# Altium PCB o_core_v1.PcbDoc (part 2 of 2)
Units mm, origin at the board's own origin, x right, y up, seen from the top; angles counter-clockwise.
Board outline 104 x 81 mm, 4 copper layers (Top Layer, GND_Layer, MidLayer2, Bottom Layer); 166 components, 151 nets, 748 pads, 250 vias.
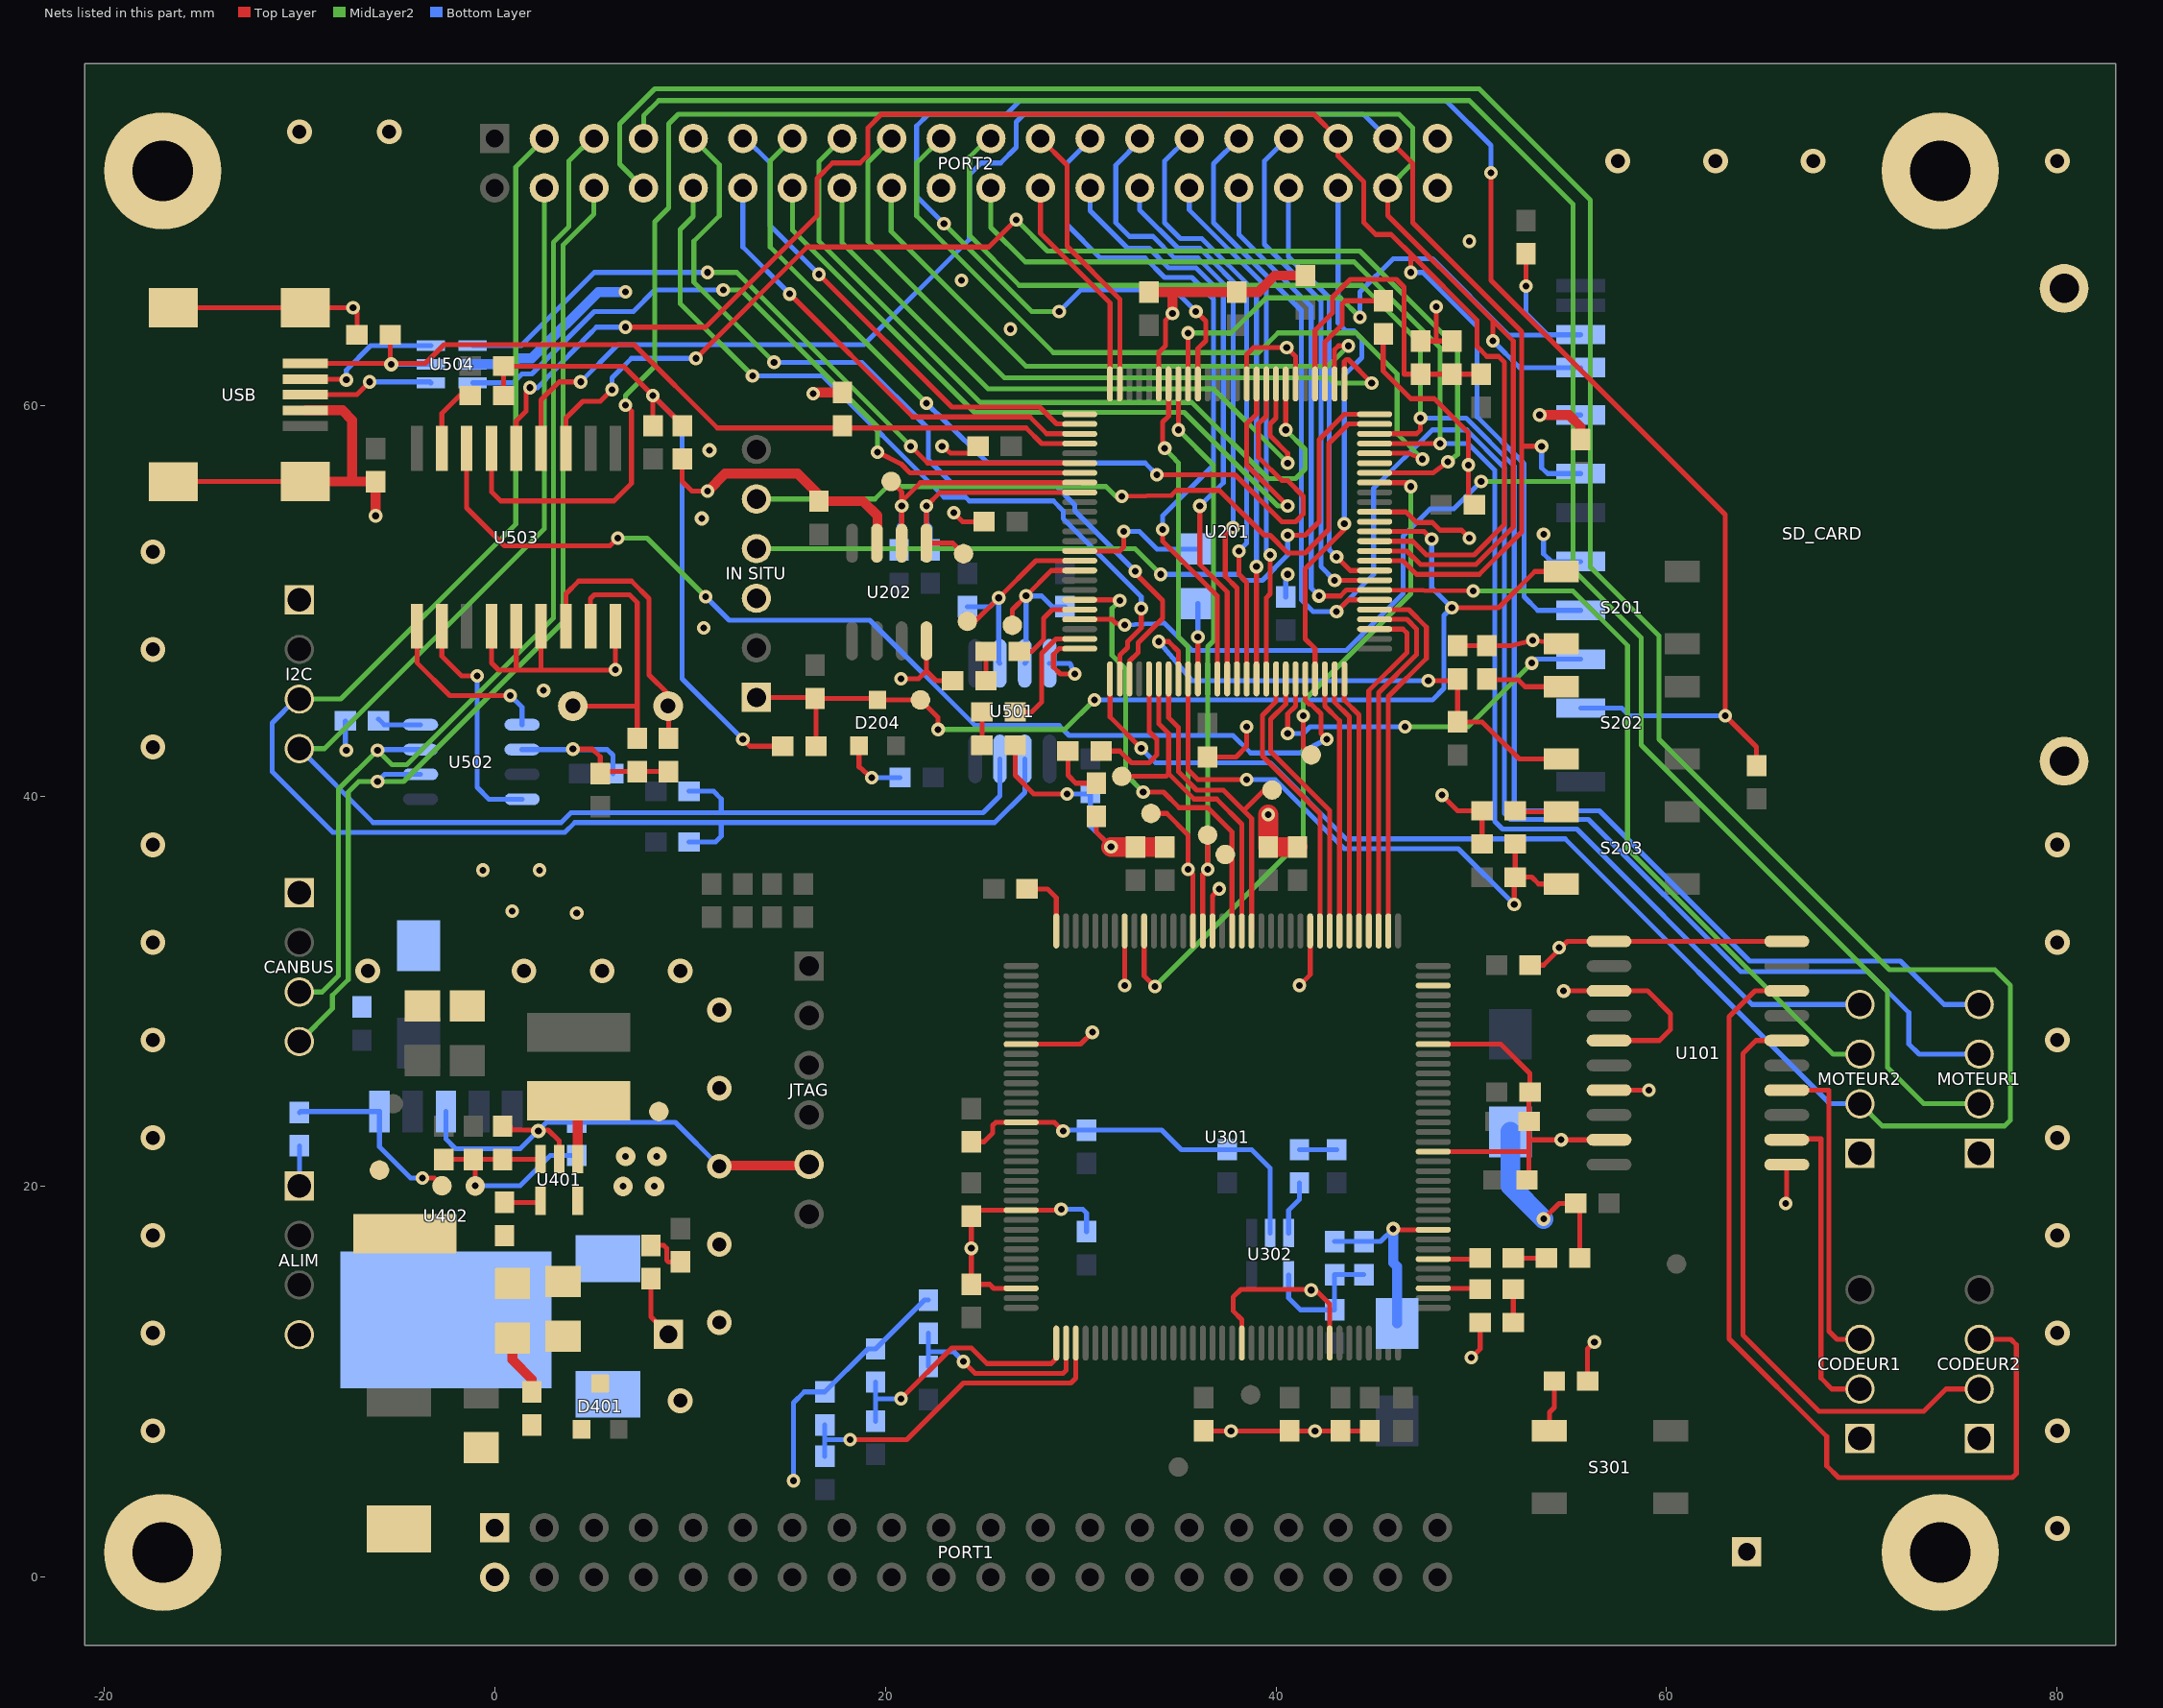
[diagram p4: the nets of this part, all layers, seen from the top]

## Via types
v1: diameter 0.7, hole 0.35, Top Layer to Bottom Layer, 202 vias
v2: diameter 1.27, hole 0.711, Top Layer to Bottom Layer, 37 vias
v3: diameter 1, hole 0.35, Top Layer to Bottom Layer, 5 vias
v4: diameter 0.75, hole 0.35, Top Layer to Bottom Layer, 3 vias
v5: diameter 0.73, hole 0.35, Top Layer to Bottom Layer, 2 vias
v6: diameter 0.7, hole 0.35, Top Layer to Bottom Layer, tented bottom, 1 vias

## Nets (pads, with @x,y where several pads share a name; then routed paths per layer and width w, separated by ;. In a path a pad name is that pad's centre, name@x,y a point inside that pad or via, vN(x,y) a via of type N, cw(c..) or ccw(c..) an arc to the next point about the centre after c; other vN are vias at no path point) (continued)
GND: "IN SITU.3" ALIM.1 ALIM.4 C101.2 C201.1 C202.1 C203.1 C204.2 C205.2 C206.1 C207.1 C209.2 C210.2 C211.2 C212.1 C213.1 C214.1 C215.2 C216.1 C217.1 C301.1 C302.1 C303.1 C304.1 C305.1 C306.1 C307.1 C308.1 C309.1 C310.1 C311.1 C312.1 C313.1 C314.1 C315.1 C316.1 C317.2 C318.2 C319.2 C320.1 C321.1 C402.1 C405.1 C406.1 C408.1 C409.2 C410.1 C411.1 C501.2 C502.1 C503.1 C504.2 C505.2 C506.2 C507.1 C509.2 C510.1 CANBUS.1 CODEUR1.1 CODEUR2.1 D204.1 D401.1 D402.1 D403.1 I2C.1 JTAG.5 MOTEUR1.1 MOTEUR2.1 P6.1 P7.1 pad.0 pad.1 pad.2 pad.3 PORT1.1 PORT1.2 PORT2.39 PORT2.40 R203.1 R206.2 R209.2 R210.2 R213.1 R214.1 R305.2 R308.1 R309.1 R310.1 R317.1 R318.2 R319.2 R401.1 R405.1 R407.1 R408.1 R501.1 S201.3 SD_CARD.3 SD_CARD.6 SD_CARD.10 SD_CARD.11 U101.1 U101.10 U101.11 U101.13 U101.15 U101.17 U101.19 U201.15 U201.31 U201.36 U201.45 U201.65 U201.75 U202.4 U202.7 U301.9 U301.17 U301.26 U301.34 U301.56 U301.65 U301.81 U301.89 U301.100 U301.106 U301.118 U301.128 U301.137 U302.2 U401.2 U402.3 U402.6 U501.4 U502.2 U503.4 U503.5 U503.6 U503.9 U504.2 USB.4 USB.MH1 USB.MH2 USB.MH3 USB.MH4 | length 365.6
  Top Layer w0.254: USB.MH3@-16.45,56.09 -9.705,56.09 USB.MH1@-9.7,56.095 ; USB.MH4@-16.45,64.99 USB.MH2@-9.7,64.99 v1(-7.252,64.999) -7.05,64.75 C509.2@-7.05,63.6 ; C504.2@-6.105,56.095 C504.2@-6.1,56.09 ; U503.4@-0.17,48.69 -0.17,46.81 0.2,46.44 1.1,46.44 ; R405.1@0.4,23.09 0.75,23.09 0.94,22.9 2.74,22.9 3.3,22.34 U401.2@3.3,21.415 ; U503.5@1.1,48.69 1.1,46.44 ; U503.6@2.37,48.69 2.37,46.47 2.4,46.44 ; v1(4,42.4) 5,42.4 5.4,42 C507.1@5.4,41.15 5.5,41.25 C502.1@7.2,41.25 ; U503.9@6.18,48.69 v1(6.18,46.46) 6.2,46.44 2.4,46.44 ; C502.1@7.3,41.25 C503.1@8.9,41.25 ; R408.1@8,15.29 8,13.34 P7.1@8.9,12.44 ; C505.2@9.6,57.25 9.6,56.1 10.1,55.6 v1(10.9,55.6) ; v2(11.5,21.04) v2@11.54,21.08 ; D204.1@18.65,42.565 18.65,41.49 v1(19.3,40.94) ; U202.7@19.565,52.94 U202.7@19.6,52.975 ; v1(20.8,46) 21.7,46 22.1,46.4 ; U202.4@22.105,47.94 22.1,47.935 22.1,46.4 ; v1(22.9,57.9) 23.34,57.54 C211.2@24.95,57.54 ; R209.2@23.45,45.9 22.6,45.9 22.1,46.4 ; v1(23.5,54.5) 23.96,54.04 C205.2@25.05,54.04 ; C307.1@24.4,22.29 25.05,22.29 25.5,22.74 25.5,23.14 25.65,23.29 U301.17@26.95,23.29 28.65,23.29 v1(29.1,22.84) ; R206.2@26.65,42.6 26.65,41.05 27.6,40.1 v1(29.3,40.1) ; U301.34@26.95,14.79 25.55,14.79 25.35,14.99 C309.1@24.4,14.99 C308.1@24.4,18.49 24.7,18.79 U301.26@26.95,18.79 28.95,18.79 v1(29,18.84) ; U301.9@26.95,27.29 29.99,27.29 v1(30.6,27.9) ; v1(29.7,46.24) 28.96,46.24 28.6,46.6 28.6,47.24 28.9,47.54 U201.75@29.95,47.54 ; U201.65@29.95,52.54 32,52.54 32.2,52.74 v1(32.2,53.54) ; R210.2@30.8,38.95 30.8,38.14 v1(31.55,37.39) v1@31.5,37.44 ; v1@32.2,30.24 v1(32.25,30.29) U301.137@32.25,33.09 ; U201.45@34,61.09 34,62.7 34.35,63.05 34.35,64.35 v1(34.7,64.7) ; C314.1@36.3,7.49 C306.1@40.7,7.49 C310.1@43.3,7.49 C321.1@44.8,7.49 ; C210.2@36.5,41.99 37.95,41.99 38.5,42.54 v1(38.5,43.54) ; U301.128@36.75,33.09 36.75,34.89 v1(37.1,35.24) ; U301.56@38.25,11.99 38.25,13.19 37.8,13.64 37.8,14.34 38.2,14.74 42,14.74 42.75,13.99 U301.65@42.75,11.99 ; U201.36@38.5,61.09 38.5,62.6 38.85,62.95 v1(40.55,62.95) 41,62.5 U201.31@41,61.09 ; v1(41.2,30.3) 41.75,30.85 U301.118@41.75,33.09 ; U201.15@45.05,54.54 46.66,54.54 47.2,54 48,54 48.4,53.6 49.5,53.6 v1(49.9,53.2) ; R203.1@45.5,63.65 45.49,63.64 45.49,61.75 46.9,60.34 48.1,60.34 49.85,58.59 v1(49.85,56.94) C201.1@49.85,55.04 ; v1(46,17.84) 46.05,17.79 U301.81@48.05,17.79 ; C207.1@47.4,63.29 48.2,63.29 ; U301.89@48.05,21.79 52.9,21.79 52.95,21.84 ; U301.100@48.05,27.29 51.51,27.29 53,25.8 C304.1@53,24.84 52.95,24.79 C315.1@52.95,23.34 52.95,22.34 ; v1@48.2,65.04 48.2,63.29 ; v1(48.5,40.04) 49.3,39.24 R214.1@50.55,39.24 C217.1@50.55,37.54 ; C214.1@49,63.29 48.2,63.29 ; C216.1@49.3,47.69 R213.1@50.8,47.69 52.05,47.69 v1(53.144,47.97) S201.3@54.6,47.79 ; v1(50,11.24) 50.45,11.69 R319.2@50.45,13.04 ; C303.1@52.85,20.34 52.95,20.44 52.95,21.84 ; C311.1@53,31.34 53.7,31.34 54.915,32.555 U101.11@57.05,32.555 U101.10@66.15,32.555 ; v1(53.7,18.34) 54.5,19.14 C101.2@55.35,19.14 55.55,18.94 R318.2@55.55,16.34 ; v1@54.8,30.04 54.7,30.04 v1(54.725,30.015) U101.13@57.05,30.015 59.025,30.015 60.2,28.84 60.2,28.04 59.635,27.475 U101.15@57.05,27.475 ; R317.1@55.95,10.04 55.95,11.69 v1(56.3,12.04) ; U101.19@57.05,22.395 53.005,22.395 52.95,22.34 ; U101.17@57.05,24.935 v1(59.095,24.935) v1@59.1,24.94 ; v1(66.1,19.14) 66.15,19.19 U101.1@66.15,21.125 ; 1.1,46.44 2.4,46.44 ; 52.95,21.84 52.95,22.34
  Top Layer w0.508: USB.MH1@-9.7,56.095 -7.3,56.095 ; USB.4@-9.7,59.74 -7.8,59.74 -7.3,59.24 -7.3,56.095 ; C504.2@-6.105,56.095 -7.3,56.095 ; v1(-6.1,54.34) C504.2@-6.1,56.09 ; v1(10.9,55.6) 11.8,56.5 15.5,56.5 16.6,55.4 C215.2@16.6,55.09 18.85,55.09 19.6,54.34 U202.7@19.6,52.975 ; v2@11.54,21.08 JTAG.5@16.1,21.08 ; v1(16.3,60.6) 16.35,60.65 C209.2@17.8,60.65 ; C203.1@33.5,65.79 35.5,65.79 ; v1(34.7,64.7) 34.7,65.79 35.5,65.79 ; C206.1@41.5,66.64 39.94,66.64 39.09,65.79 C202.1@38,65.79 35.5,65.79 ; v1(53.5,59.5) 55,59.5 55.6,58.9 C213.1@55.6,58.25
  Top Layer w1.016: v1(31.55,37.39) C312.1@32.8,37.39 C302.1@34.3,37.39 ; v1(39.6,39.04) C316.1@39.6,37.39 C301.1@41.1,37.39
  Bottom Layer w0.254: ALIM.1@-10,20.04 C411.1@-10,22.09 ; R501.1@-7.65,43.84 -7.65,42.39 v1(-7.6,42.34) ; U402.3@-2.5,23.84 -2.5,22.44 -2,21.94 1.3,21.94 2.65,23.29 C408.1@4.2,23.29 9.25,23.29 v2(11.5,21.04) ; U502.2@1.4,42.375 5.765,42.375 6.05,42.09 C501.2@6.05,41.14 ; v1(15.3,4.94) 15.3,8.94 15.85,9.49 R310.1@16.9,9.49 19.1,11.69 R309.1@19.5,11.69 22,14.19 R308.1@22.2,14.19 ; v1(19.3,40.94) C506.2@20.75,40.94 ; U501.4@28.405,46.79 29.45,46.79 v1(29.7,46.24) ; v1(29,18.84) 30.1,18.84 30.3,18.64 C305.1@30.3,17.69 ; v1(29.1,22.84) 29.15,22.89 C313.1@30.3,22.89 34.15,22.89 35.15,21.89 C319.2@37.5,21.89 38.75,21.89 39.7,20.94 U302.2@39.7,17.615 ; v1(29.3,40.1) 30.41,40.1 C510.1@30.5,40.19 30.5,38.44 v1(31.55,37.39) ; v1(32.2,53.54) 33,53.54 33.9,52.64 C204.2@36,52.64 ; C212.1@40.5,50.19 40.5,51.24 v1(40.6,51.34) ; R305.2@43,17.19 C320.1@44.5,17.19 45.35,17.19 v1(46,17.84) ; v1(53.5,59.5) SD_CARD.6@55.6,59.5 ; v1(53.7,53.4) 53.7,52.4 54.1,52 SD_CARD.3@55.6,52
  Bottom Layer w0.508: U504.2@-1.125,62.1 0.9,62.1 1.2,62.4 1.9,62.4 5.3,65.8 v1(6.7,65.8) ; v1(46,17.84) 46,16.1 46.2,15.9 C317.2@46.2,13
  Bottom Layer w1.016: C318.2@52,22.8 52,20.04 v1(53.7,18.34)
  other v1: 37.7,7.49 42,7.49 41.8,14.7 24.4,16.84 54.6,22.395 54.5,32.24 4.2,34 0.9,34.1 -0.6,36.2 2.3,36.2 2.5,45.4 10.7,48.6 26.4,63.9 48.2,65.04 23.9,66.4 49.9,68.4
  other v2: 80,2.5 -17.5,7.5 80,7.5 9.5,9.04 -17.5,12.5 80,12.5 11.5,13.04 11.5,17.04 -17.5,17.5 80,17.5 -17.5,22.5 80,22.5 11.5,25.04 -17.5,27.5 80,27.5 11.5,29.04 -6.5,31.04 1.5,31.04 5.5,31.04 9.5,31.04 -17.5,32.5 80,32.5 -17.5,37.5 80,37.5 -17.5,42.5 -17.5,47.5 -17.5,52.5 57.5,72.5 62.5,72.5 67.5,72.5 80,72.5 -10,74 -5.4,74
  other v4: 2.231,22.84 10.6,54.2 11,57.7
NetC204_1: C204.1 U201.85 | length 3.8
  Top Layer w0.254: U201.85@36,45.99 v1(36,48.14)
  Bottom Layer w0.254: v1(36,48.14) C204.1@36,49.84
NetC320_2: C320.2 R304.1 R305.1 U302.4 | length 7.1
  Bottom Layer w0.254: U302.4@40.65,15.465 40.65,14.29 41.25,13.69 R304.1@43,13.69 R305.1@43,15.49 C320.2@44.5,15.49
NetC401_1: C401.1 R401.2 | length 3.2
  Top Layer w0.508: C401.1@0.9,12.24 0.9,11.14 1.9,10.14 R401.2@1.9,9.49
NetC401_2: C401.2 C402.2 D401.3 L401.2 P2.1 R402.1 U401.5
NetC411_2: C411.2 P18.1 U402.1 | length 9.9
  Top Layer w0.254: v1(-3.7,20.44) -3.1,20.44 P18.1@-2.7,20.04
  Bottom Layer w0.254: C411.2@-10,23.79 -9.95,23.84 U402.1@-5.9,23.84 -5.9,22.04 -4.3,20.44 v1(-3.7,20.44)
NetC502_2: C502.2 U503.8 Y501.1 | length 14.3
  Top Layer w0.254: Y501.1@4,44.6 7.3,44.6 ; U503.8@4.91,48.69 4.9,48.7 4.9,50.1 5.1,50.3 6.9,50.3 7.3,49.9 7.3,44.6 ; C502.2@7.3,42.95 7.3,44.6
NetC503_2: C503.2 U503.7 Y501.2 | length 14.1
  Top Layer w0.254: U503.7@3.64,48.69 3.64,50.34 4.3,51 7,51 7.9,50.1 7.9,46.2 8.9,45.2 C503.2@8.9,42.95
NetC505_1: C505.1 D501.1 R502.2 R505.1 R506.2 | length 35.2
  Top Layer w0.254: R502.2@0.45,60.5 R505.1@0.45,62 6.6,62 v1(8.1,60.5) ; D501.1@8.1,58.95 v1(8.1,60.5) ; C505.1@9.6,58.95 9.6,59 v1(8.1,60.5) ; v1(12.7,42.9) 13.06,42.54 R506.2@14.75,42.54
  Bottom Layer w0.254: v1(8.1,60.5) 9.6,59 9.6,46 v1(12.7,42.9)
NetD201_1: D201.1 U201.74 | length 6.3
  Top Layer w0.254: D201.1@26.65,44.3 27.5,44.3 28,44.8 28,47.3 28.74,48.04 U201.74@29.95,48.04
NetD201_2: D201.2 R206.1 | length 1.7
  Top Layer w0.254: D201.2@24.95,44.3 24.95,42.7 R206.1@25.05,42.6
NetD202_1: D202.1 U201.71 | length 4.6
  Top Layer w0.254: D202.1@26.85,47.4 27.5,47.4 27.95,47.85 28.1,48 28.1,49.1 28.54,49.54 U201.71@29.95,49.54
NetD202_2: D202.2 R209.1 | length 1.5
  Top Layer w0.254: R209.1@25.15,45.9 D202.2@25.15,47.4
NetD203_1: D203.1 U201.80 | length 7.3
  Top Layer w0.254: D203.1@31.05,42.3 32,42.3 32.6,41.7 33.5,41.7 33.9,42.1 33.9,42.9 33.5,43.3 U201.80@33.5,45.99
NetD203_2: D203.2 R210.1 | length 2.9
  Top Layer w0.254: D203.2@29.35,42.3 29.35,41.05 29.75,40.65 R210.1@30.8,40.65
NetD301_1: D301.1 U301.78 | length 2.4
  Top Layer w0.254: U301.78@48.05,16.29 50.4,16.29 D301.1@50.45,16.34
NetD301_2: D301.2 R318.1 | length 1.7
  Top Layer w0.254: D301.2@52.15,16.34 R318.1@53.85,16.34
NetD302_1: D302.1 U301.75 | length 2.4
  Top Layer w0.254: U301.75@48.05,14.79 50.4,14.79 D302.1@50.45,14.74
NetD302_2: D302.2 R319.1 | length 1.7
  Top Layer w0.254: R319.1@52.15,13.04 D302.2@52.15,14.74
NetD403_2: D403.2 L402.1 P3.1 U401.1 | length 3
  Top Layer w0.254: L402.1@4.25,24.34 L402.1@4.3,24.39
  Top Layer w0.508: U401.1@4.25,21.415 L402.1@4.25,24.34
  other v3: 6.573,20.013 8.173,20.013 6.7,21.54 8.3,21.54
NetD404_2: D404.2 R408.2 | length 2.2
  Top Layer w0.254: R408.2@8,16.99 8.65,16.99 8.8,16.84 8.8,16.24 8.9,16.14 D404.2@9.5,16.14
NetR213_2: R213.2 S202.1 | length 4
  Top Layer w0.254: R213.2@50.8,45.99 50.85,45.94 52.4,45.94 52.75,45.59 S202.1@54.6,45.59
NetR214_2: R214.2 S203.1 | length 2.4
  Top Layer w0.254: R214.2@52.25,39.24 52.3,39.19 S203.1@54.6,39.19
NetR301_1: R301.1 R308.2 U301.38 | length 10.7
  Top Layer w0.254: v1(24,11.04) 24.6,10.44 29.1,10.44 29.25,10.59 U301.38@29.25,11.99
  Bottom Layer w0.254: R301.1@22.2,10.79 22.2,11.54 ; R308.2@22.2,12.49 22.2,11.54 ; v1(24,11.04) 23.5,11.54 22.2,11.54
NetR302_1: R302.1 R309.2 U301.37 | length 13.6
  Top Layer w0.254: v1(20.8,9.14) 23.4,11.74 24.4,11.74 25.2,10.94 28.5,10.94 28.75,11.19 U301.37@28.75,11.99
  Bottom Layer w0.254: R302.1@19.5,7.99 19.5,9.14 ; R309.2@19.5,9.99 19.5,9.14 ; v1(20.8,9.14) 19.5,9.14
NetR303_1: R303.1 R310.2 U301.39 | length 17.6
  Top Layer w0.254: v1(18.2,7.04) 21.1,7.04 24,9.94 29.5,9.94 29.75,10.19 U301.39@29.75,11.99
  Bottom Layer w0.254: R303.1@16.9,6.19 16.9,7.04 ; R310.2@16.9,7.79 16.9,7.04 ; v1(18.2,7.04) 16.9,7.04
NetR306_1: R306.1 R315.2 | length 1.9
  Bottom Layer w0.254: R306.1@41.2,21.89 R315.2@43.1,21.89
NetR306_2: R306.2 U302.3 | length 2.8
  Bottom Layer w0.254: U302.3@40.65,17.615 40.65,18.79 41.2,19.34 R306.2@41.2,20.19
NetR317_2: R317.2 S301.1 | length 2.7
  Top Layer w0.254: S301.1@54,7.49 54,8.44 54.25,8.69 R317.2@54.25,10.04
NetR320_2: R320.2 U301.144 | length 3.4
  Top Layer w0.254: R320.2@27.25,35.24 28.3,35.24 28.75,34.79 U301.144@28.75,33.09
NetR402_2: R402.2 U401.4 | length 1.9
  Top Layer w0.254: R402.2@0.5,19.19 2.275,19.19 U401.4@2.35,19.265
NetR501_2: R501.2 U502.8 | length 2.3
  Bottom Layer w0.254: R501.2@-5.95,43.94 -5.655,43.645 U502.8@-3.8,43.645
NetR502_1: R502.1 U503.17 | length 3.6
  Top Layer w0.254: U503.17@-2.71,57.79 -2.71,59.59 -1.8,60.5 R502.1@-1.25,60.5
NetU502_1: U502.1 U503.1 | length 9.1
  Top Layer w0.254: U503.1@-3.98,48.69 -3.98,46.82 -2.3,45.14 v1(0.8,45.14)
  Bottom Layer w0.254: v1(0.8,45.14) 1.4,44.54 U502.1@1.4,43.645
NetU502_4: U502.4 U503.2 | length 12
  Top Layer w0.254: U503.2@-2.71,48.69 -2.71,47.15 -1.7,46.14 v1(-0.9,46.14)
  Bottom Layer w0.254: v1(-0.9,46.14) -0.9,40.44 -0.295,39.835 U502.4@1.4,39.835
NetU504_4: U504.4 USB.3 | length 6.7
  Top Layer w0.254: USB.3@-9.7,60.54 -7.06,60.54 v1(-6.4,61.2)
  Bottom Layer w0.254: v1(-6.4,61.2) -3.325,61.2 U504.4@-3.275,61.15
NetU504_6: U504.6 USB.2 | length 7.5
  Top Layer w0.254: USB.2@-9.7,61.34 -7.64,61.34 v1(-7.6,61.3)
  Bottom Layer w0.254: v1(-7.6,61.3) -7.6,61.8 -6.35,63.05 U504.6@-3.275,63.05
OCORE_CAN_CANH: CANBUS.3 PORT2.5 U502.7 | length 54.8
  MidLayer2 w0.254: CANBUS.3@-10,29.96 -8.84,29.96 -8,30.8 -8,40.34 v1(-6,42.34) -5.25,41.59 -4.51,41.59 3,49.1 3,68.34 3.8,69.14 3.8,72.5 PORT2.5@5.02,73.72
  Bottom Layer w0.254: v1(-6,42.34) -5.965,42.375 U502.7@-3.8,42.375
OCORE_CAN_CANL: CANBUS.4 PORT2.6 U502.6 | length 53.6
  MidLayer2 w0.254: CANBUS.4@-10,27.42 -8.31,29.11 -8.31,29.79 -7.5,30.6 -7.5,40.2 -6.96,40.74 -4.66,40.74 3.5,48.9 3.5,68.2 5.08,69.78 PORT2.6@5.08,71.12
  Bottom Layer w0.254: v1(-6,40.74) -5.635,41.105 U502.6@-3.8,41.105
OCORE_I2C_SCL: I2C.4 PORT2.4 R503.1 U501.7 | length 77
  MidLayer2 w0.254: I2C.4@-10,42.42 -8.72,42.42 2.54,53.68 PORT2.4@2.54,71.12
  Bottom Layer w0.254: I2C.4@-10,42.42 -6.22,38.64 3.4,38.64 3.9,39.14 11.6,39.14 ; R503.1@9.95,40.24 11.2,40.24 11.6,39.84 11.6,39.14 ; U501.7@25.865,41.89 25.865,40.005 25,39.14 11.6,39.14
OCORE_I2C_SDA: I2C.3 PORT2.3 R504.1 U501.6 | length 84.4
  MidLayer2 w0.254: I2C.3@-10,44.96 -7.88,44.96 1.075,53.915 1.075,72.195 PORT2.3@2.54,73.66
  Bottom Layer w0.254: I2C.3@-10,44.96 -10.18,44.96 -11.4,43.74 -11.4,41.24 -8.3,38.14 3.6,38.14 4.1,38.64 11.6,38.64 ; R504.1@9.95,37.64 11.3,37.64 11.6,37.94 11.6,38.64 ; U501.6@27.135,41.89 27.135,40.175 25.6,38.64 11.6,38.64
PHA1: CODEUR1.2 U101.2 | length 16.2
  Top Layer w0.254: U101.2@66.15,22.395 66.195,22.44 67.9,22.44 67.9,10.2 68.46,9.64 CODEUR1.2@69.9,9.64
PHA2: CODEUR2.2 U101.6 | length 31.3
  Top Layer w0.254: U101.6@66.275,27.6 U101.6@66.15,27.475 64.575,27.475 63.9,26.8 63.9,12.4 67.8,8.5 73.16,8.5 74.3,9.64 CODEUR2.2@76,9.64
PHB1: CODEUR1.3 U101.4 | length 16.3
  Top Layer w0.254: U101.4@66.15,24.935 68.305,24.935 68.305,12.595 68.72,12.18 CODEUR1.3@69.9,12.18
PHB2: CODEUR2.3 U101.8 | length 47.2
  Top Layer w0.254: U101.8@66.15,30.015 64.515,30.015 63.2,28.7 63.2,12.2 68.2,7.2 68.2,5.7 68.8,5.1 77.7,5.1 77.9,5.3 77.9,11.9 77.62,12.18 CODEUR2.3@76,12.18
PIC_ADC_AN0: MOTEUR1.4 PORT2.21 U201.23 | length 88.9
  Top Layer w0.254: U201.23@45.05,58.54 47.2,58.54 47.4,58.74 v1(47.4,59.34)
  MidLayer2 w0.254: PORT2.21@25.4,73.66 25.26,73.66 24.3,72.7 24.3,68.7 26.86,66.14 44.41,66.14 47.4,63.15 v1(47.4,59.34)
  Bottom Layer w0.254: v1(47.4,59.34) 49.735,59.34 52.2,56.875 52.2,39.6 52.56,39.24 56.56,39.24 64.255,31.545 71.975,31.545 74.2,29.32 MOTEUR1.4@76,29.32
PIC_ADC_AN1: MOTEUR2.4 PORT2.22 U201.22 | length 79.7
  Top Layer w0.254: U201.22@45.05,58.04 v1(48.4,58.04)
  MidLayer2 w0.254: PORT2.22@25.4,71.12 25.4,69.1 27.16,67.34 44,67.34 48.4,62.94 v1(48.4,58.04)
  Bottom Layer w0.254: v1(48.4,58.04) 49.835,58.04 51.2,56.675 51.2,38.7 51.6,38.3 55.4,38.3 64.38,29.32 MOTEUR2.4@69.9,29.32
PIC_ADC_AN2: PORT2.19 U201.21 | length 40.7
  Top Layer w0.254: U201.21@45.05,57.54 46.8,57.54 v1(47.5,57.24)
  MidLayer2 w0.254: PORT2.19@22.86,73.66 21.6,72.4 21.6,69.7 28.6,62.7 39.105,62.7 40.105,63.7 44.1,63.7 46.2,61.6 46.2,58.54 v1(47.5,57.24)
PIC_ADC_AN3: PORT2.20
PIC_ADC_AN4: PORT2.17 U201.26 | length 37.7
  Top Layer w0.254: U201.26@43.5,61.09 43.5,62.24 43.6,62.34 43.7,62.34 v1(44.9,61.14)
  MidLayer2 w0.254: PORT2.17@20.32,73.66 19.1,72.44 19.1,68.4 26.1,61.4 42.74,61.4 43,61.14 v1(44.9,61.14)
PIC_ADC_AN5: PORT2.18 U201.27 | length 31.4
  Top Layer w0.254: U201.27@43,61.09 43,62.84 43.2,63.04 v1(43.7,63.04)
  MidLayer2 w0.254: PORT2.18@20.32,71.12 20.3,71.1 20.3,68.9 27.2,62 42.66,62 v1(43.7,63.04)
PIC_ADC_AN6: PORT2.15 U201.32 | length 40.7
  Top Layer w0.254: v1(40.5,58.74) U201.32@40.5,61.09
  MidLayer2 w0.254: PORT2.15@17.78,73.66 16.6,72.48 16.6,68.4 24.86,60.14 35.7,60.14 39.6,56.24 41,56.24 41.5,56.74 41.5,57.74 v1(40.5,58.74)
PIC_ADC_AN7: PORT2.16 U201.33 | length 34.8
  Top Layer w0.254: U201.33@40,61.09 40,59.34 39.7,59.04 39.7,58.44 40.6,57.54 v1(40.6,57.04)
  MidLayer2 w0.254: PORT2.16@17.78,71.12 17.78,68.32 25.26,60.84 36.8,60.84 v1(40.6,57.04)
PIC_ADC_AN8: PORT2.13 U201.34 | length 47.2
  Top Layer w0.254: v1(33.9,56.44) 37.9,56.44 40.3,54.04 41,54.04 41.4,54.44 41.4,55.34 40.6,56.14 40.3,56.14 39.1,57.34 39.1,59.04 39.5,59.44 U201.34@39.5,60.74
  MidLayer2 w0.254: PORT2.13@15.24,73.66 14.1,72.52 14.1,68.1 v1(22.1,60.1)
  Bottom Layer w0.254: PORT2.13@14.96,73.66 PORT2.13@15.24,73.66 ; v1(22.1,60.1) 25.26,57.04 33.3,57.04 v1(33.9,56.44)
PIC_ADC_AN9: PORT2.14 U201.35 | length 40.7
  Top Layer w0.254: U201.35@39,61.09 39,59.54 38.5,59.04 38.5,56.94 v1(40.6,54.84)
  MidLayer2 w0.254: PORT2.14@15.24,71.12 15.24,68.96 24.56,59.64 35.3,59.64 40.1,54.84 v1(40.6,54.84)
PIC_ADC_VREF+: C207.2 C214.2 R202.1 U201.29 | length 17.4
  Top Layer w0.254: U201.29@42,61.09 42,63.84 42.9,64.74 42.9,65.54 43.8,66.44 46.16,66.44 46.55,66.05 46.55,61.59 C207.2@47.4,61.59 C214.2@49,61.59 R202.1@50.5,61.59
PIC_ADC_VREF-: R203.2 U201.28 | length 6.6
  Top Layer w0.254: U201.28@42.5,61.09 42.5,63.24 43.38,64.12 43.38,65.18 43.55,65.35 R203.2@45.5,65.35
PIC_BP_1: C216.2 R207.1 S202.3 U201.83 | length 27.2
  Top Layer w0.254: v1(34,47.9) 34.5,47.9 35,47.4 U201.83@35,45.99 ; v1(47.8,45.9) 49.21,45.9 C216.2@49.3,45.99 R207.1@49.3,43.79 50.55,43.79 52.45,41.89 S202.3@54.6,41.89
  Bottom Layer w0.254: v1(34,47.9) 35.7,45.9 v1(47.8,45.9)
PIC_BP_2: C217.2 R208.1 S203.3 U201.84 | length 29.7
  Top Layer w0.254: U201.84@35.5,45.99 35.5,41.34 36,40.84 v6@38.4,40.84 ; v1(52.2,34.44) 52.2,35.79 R208.1@52.25,35.84 ; C217.2@52.25,37.54 R208.1@52.25,35.84 ; S203.3@54.6,35.49 53.45,35.49 53.1,35.84 R208.1@52.25,35.84
  Bottom Layer w0.254: v6(38.5,40.84) 39.96,40.84 43.5,37.3 49.34,37.3 v1(52.2,34.44)
PIC_CAN_INT: U201.19 U503.12 | length 64.5
  Top Layer w0.254: U503.12@3.64,57.79 3.64,59.34 4.5,60.2 5.4,60.2 v1(6,60.8) ; v1(10.3,62.4) 16,68.1 25.3,68.1 v1(26.7,69.5) ; U201.19@45.05,56.54 48.04,56.54 v1(48.8,57.1)
  MidLayer2 w0.254: v1(26.7,69.5) 28.3,67.9 44.3,67.9 49.3,62.9 49.3,57.49 v1(48.8,57.1)
  Bottom Layer w0.254: v1(6,60.8) 6,61.4 7,62.4 v1(10.3,62.4)
PIC_EEPROM_SCL: P16.1 R212.1 U201.58 U202.6 | length 15.2
  Top Layer w0.254: P16.1@20.3,56.1 20.835,55.565 v1@20.835,55.075 ; U202.6@20.835,52.94 v1(20.835,54.84) v1@20.835,55.075 ; U201.58@29.95,56.04 21.8,56.04 v1@20.835,55.075
  Bottom Layer w0.254: R212.1@20.7,52.59 20.7,53.805 20.835,53.94 v1(20.835,54.84)
PIC_EEPROM_SDA: P15.1 R211.1 U201.59 U202.5 | length 14.5
  Top Layer w0.254: P15.1@24,52.4 23.46,52.94 U202.5@22.105,52.94 v1(22.105,54.845) 22.8,55.54 U201.59@29.95,55.54
  Bottom Layer w0.254: v1(22.105,54.845) 22.105,53.935 22.3,53.74 R211.1@22.3,52.59
PIC_GPIO_0: MOTEUR1.3 PORT2.31 U201.6 | length 94.1
  Top Layer w0.254: v1(43.1,49.44) 43.7,50.04 U201.6@45.05,50.04
  Bottom Layer w0.254: PORT2.31@38.1,73.66 36.8,72.36 36.8,69.34 41.3,64.84 41.3,50.04 41.9,49.44 v1(43.1,49.44) 45,51.34 45,55.74 48,58.74 49.76,58.74 51.7,56.8 51.7,39.1 52,38.8 56,38.8 63.8,31 70.3,31 72.4,28.9 72.4,27.3 72.92,26.78 MOTEUR1.3@76,26.78
PIC_GPIO_1: MOTEUR2.3 PORT2.32 U201.7 | length 66.3
  Top Layer w0.254: v1(42.2,50.24) 43.3,50.24 43.6,50.54 U201.7@45.05,50.54 v1(50.1,50.5)
  MidLayer2 w0.254: v1(50.1,50.5) 55.2,50.5 58,47.7 58,37.3 68.52,26.78 MOTEUR2.3@69.9,26.78
  Bottom Layer w0.254: PORT2.32@38.1,71.12 38.1,68.74 41.8,65.04 41.8,50.64 v1(42.2,50.24)
PIC_GPIO_2: PORT2.33 U201.8 | length 26.7
  Top Layer w0.254: v1(43,51.04) U201.8@45.05,51.04
  Bottom Layer w0.254: PORT2.33@40.6,73.7 39.4,72.5 39.4,68.24 42.3,65.34 42.3,51.74 v1(43,51.04)
PIC_GPIO_3: PORT2.34 U201.9 | length 22.1
  Top Layer w0.254: v1(43.1,52.24) 43.8,51.54 U201.9@45.05,51.54
  Bottom Layer w0.254: PORT2.34@40.64,71.12 40.64,67.6 42.725,65.515 42.725,52.615 v1(43.1,52.24)
PIC_GPIO_4: PORT2.25 U201.87 | length 35.6
  Top Layer w0.254: v1(34.2,53.64) 34.2,53.04 37,50.24 U201.87@37,45.99
  Bottom Layer w0.254: PORT2.25@30.52,73.62 29.3,72.4 29.3,69.24 31,67.54 33.3,67.54 34.3,66.54 35.7,66.54 36.8,65.44 36.8,56.94 34.2,54.34 v1(34.2,53.64)
PIC_GPIO_5: PORT2.26 U201.88 | length 30.5
  Top Layer w0.254: v5(36.1,54.84) 36.1,51.84 37.5,50.44 U201.88@37.5,45.99
  Bottom Layer w0.254: PORT2.26@30.48,71.12 30.48,69.96 32.4,68.04 33.5,68.04 34.5,67.04 35.9,67.04 37.3,65.64 37.3,56.04 v5(36.1,54.84)
PIC_GPIO_6: PORT2.27 U201.89 | length 32.4
  Top Layer w0.254: v1(37.8,53.74) 37.4,53.34 37.4,51.24 38,50.64 U201.89@38,45.99
  Bottom Layer w0.254: PORT2.27@33.09,73.59 31.8,72.3 31.8,69.34 32.5,68.64 33.7,68.64 34.8,67.54 36,67.54 37.8,65.74 v1(37.8,53.74)
PIC_GPIO_7: PORT2.28 U201.90 | length 28.4
  Top Layer w0.254: v1(38.1,52.54) 38.1,51.34 38.5,50.94 U201.90@38.5,45.99
  Bottom Layer w0.254: PORT2.28@33.02,71.12 33.02,70 34.98,68.04 36.1,68.04 38.5,65.64 38.5,52.94 v1(38.1,52.54)
PIC_GPIO_8: PORT2.29 U201.91 | length 30.8
  Top Layer w0.254: U201.91@39,45.99 v1(39,51.74)
  Bottom Layer w0.254: PORT2.29@35.51,73.71 34.3,72.5 34.3,69.34 35.1,68.54 36.2,68.54 39,65.74 v1(39,51.74)
PIC_GPIO_9: PORT2.30 U201.92 | length 26.9
  Top Layer w0.254: U201.92@39.5,45.99 39.5,50.14 39.7,50.34 v1(39.7,52.34)
  Bottom Layer w0.254: PORT2.30@35.56,71.12 35.56,70 39.5,66.06 39.5,52.54 v1(39.7,52.34)
PIC_I2C_SCL: P14.1 R205.1 U201.66 U501.2 | length 12.2
  Top Layer w0.254: P14.1@24.2,48.94 24.6,48.94 v1(25.8,50.14) 27.7,52.04 U201.66@29.95,52.04
  Bottom Layer w0.254: R205.1@24.2,49.69 25.35,49.69 v1(25.8,50.14) 25.8,46.855 U501.2@25.865,46.79
PIC_I2C_SDA: P13.1 R204.1 U201.67 U501.3 | length 10.8
  Top Layer w0.254: P13.1@26.5,48.74 26.5,49.54 v1(27.2,50.24) 28.5,51.54 U201.67@29.95,51.54
  Bottom Layer w0.254: U501.3@27.135,46.79 27.2,46.855 v1(27.2,50.24) 28,50.24 28.55,49.69 R204.1@29.2,49.69
PIC_INSITU_PGC: "IN SITU.5" U201.24 | length 38.9
  Top Layer w0.254: v1(32.1,55.34) 34.652,55.392 34.9,55.64 37.1,55.64 39.4,53.34 39.7,53.34 40.6,52.44 41.5,52.44 42.7,53.64 42.7,58.04 43.7,59.04 U201.24@45.05,59.04
  MidLayer2 w0.254: 13.4,55.2 19.46,55.2 20.1,55.84 31.3,55.84 31.8,55.34 v1(32.1,55.34)
PIC_INSITU_PGD: "IN SITU.4" U201.25 | length 38.9
  Top Layer w0.254: v1(40.6,53.34) 41.5,53.34 42.2,54.04 42.2,58.24 43.5,59.54 U201.25@45.05,59.54
  MidLayer2 w0.254: 13.4,52.66 32.78,52.66 v1(34.1,51.34)
  Bottom Layer w0.254: v1(34.1,51.34) 38.1,51.34 38.4,51.04 39.3,51.04 40.6,52.34 v1(40.6,53.34)
PIC_INT1: P17.1 U201.18 U301.135 | length 38.2
  Top Layer w0.254: U301.135@33.25,33.09 33.25,30.79 v1(33.8,30.24) ; v1(41.4,44.1) 41.4,42.5 P17.1@41.8,42.1 ; U201.18@45.05,56.04 46.7,56.04 v1(46.9,55.84)
  MidLayer2 w0.254: v1(33.8,30.24) 41.4,37.84 v1(41.4,44.1) 41.4,44.84 46.9,50.34 v1(46.9,55.84)
PIC_PMP_PMALH: P12.1 U201.43 U301.129 | length 30.7
  Top Layer w0.254: v1(35,58.74) U201.43@35,61.09 ; U301.129@36.25,33.09 36.25,35.99 v1(36.5,36.24) P12.1@36.5,38
  MidLayer2 w0.254: v1(35,58.74) 36.8,56.94 36.8,47.94 36.5,47.64 v1(36.5,36.24)
PIC_PMP_PMALL: P11.1 U201.44 U301.130 | length 32.9
  Top Layer w0.254: P11.1@33.6,39.1 34.4,39.1 35.5,38 v1(35.5,36.24) 35.75,35.99 U301.130@35.75,33.09 ; v1(34.3,57.8) 34.2,57.9 34.2,59.14 34.5,59.44 U201.44@34.5,61.09
  MidLayer2 w0.254: v1(34.3,57.8) 35,57.04 35,48.14 35.5,47.64 v1(35.5,36.24)
PIC_PMP_PMCS2: P10.1 U201.70 U301.126 | length 23.1
  Top Layer w0.254: U201.70@29.95,50.04 31.8,50.04 v1(32,50) ; v1(33.2,40.2) 34.24,40.2 35.04,39.4 36.5,39.4 37.75,38.15 U301.126@37.75,33.09
  MidLayer2 w0.254: v1(32,50) 31.6,49.6 31.6,47.2 32.3,46.5 32.3,41.1 v1(33.2,40.2)
PIC_PMP_PMD0: U201.93 U301.117 | length 14.4
  Top Layer w0.254: U201.93@40,45.99 40,44.828 39.3,44.128 39.3,42.04 42.25,39.09 U301.117@42.25,33.09
PIC_PMP_PMD1: U201.94 U301.116 | length 14.5
  Top Layer w0.254: U201.94@40.5,45.99 40.5,44.7 39.73,43.93 39.73,42.27 42.75,39.25 U301.116@42.75,33.09
PIC_PMP_PMD2: U201.98 U301.115 | length 13.2
  Top Layer w0.254: U201.98@42.5,45.99 42.5,44.6 43.25,43.85 U301.115@43.25,33.09
PIC_PMP_PMD3: U201.99 U301.114 | length 13.2
  Top Layer w0.254: U201.99@43,45.99 43,44.8 43.75,44.05 U301.114@43.75,33.09
PIC_PMP_PMD4: U201.100 U301.113 | length 13.2
  Top Layer w0.254: U201.100@43.5,45.99 43.5,44.9 44.25,44.15 U301.113@44.25,33.09
PIC_PMP_PMD5: U201.3 U301.112 | length 17.8
  Top Layer w0.254: U301.112@44.75,33.09 44.75,45.39 46.7,47.34 46.7,48.34 46.5,48.54 U201.3@45.05,48.54
PIC_PMP_PMD6: U201.4 U301.111 | length 18.6
  Top Layer w0.254: U201.4@45.05,49.04 46.7,49.04 47.2,48.54 47.2,47.24 45.25,45.29 U301.111@45.25,33.09
PIC_PMP_PMD7: U201.5 U301.110 | length 19.4
  Top Layer w0.254: U201.5@45.05,49.54 46.8,49.54 47.7,48.64 47.7,47.04 45.75,45.09 U301.110@45.75,33.09
PIC_PMP_PMRD: P9.1 U201.82 U301.124 | length 17.3
  Top Layer w0.254: U201.82@34.5,45.99 34.5,44 35,43.5 35,41.24 35.94,40.3 37.3,40.3 38.348,39.252 ; U301.124@38.75,33.09 38.75,38.85 38.348,39.252 ; P9.1@39.8,40.3 39.396,40.3 38.348,39.252
PIC_PMP_PMWR: P8.1 U201.81 U301.125 | length 17.8
  Top Layer w0.254: P8.1@32.1,41 34.36,41 34.5,41.14 ; U201.81@34,45.99 34,43.7 34.5,43.2 34.5,41.14 ; U301.125@38.25,33.09 38.25,38.55 36.96,39.84 35.8,39.84 34.5,41.14
PIC_PWM_0: MOTEUR1.2 PORT2.7 U201.72 | length 138.8
  Top Layer w0.254: U201.72@29.95,49.04 31.6,49.04 31.8,48.84 v1(32.249,48.75)
  MidLayer2 w0.254: PORT2.7@7.62,73.66 7.62,74.82 8.4,75.6 49.9,75.6 55.2,70.3 55.2,56.1 ; v1(50.5,56.1) 55.2,56.1 ; MOTEUR1.2@76,24.24 73.16,24.24 71.3,26.1 71.3,30 58.7,42.6 58.7,48.1 55.2,51.6 55.2,56.1
  Bottom Layer w0.254: v1(32.249,48.75) 34.3,48.84 35.7,47.44 43.6,47.44 46.5,50.34 46.5,53.3 47.9,54.7 49.1,54.7 v1(50.5,56.1)
PIC_PWM_1: MOTEUR2.2 PORT2.8 U201.76 | length 173.4
  Top Layer w0.254: U201.76@31.5,45.99 31.5,44.04 v1(33.1,42.44)
  MidLayer2 w0.254: PORT2.8@7.62,71.12 6.4,72.34 6.4,74.4 8.2,76.2 50.4,76.2 56.1,70.5 56.1,51.7 59.6,48.2 59.6,42.9 71.4,31.1 76.8,31.1 77.6,30.3 77.6,23.4 77.3,23.1 71.04,23.1 MOTEUR2.2@69.9,24.24
  Bottom Layer w0.254: v1(33.1,42.44) 33.84,41.7 39.7,41.7 43.6,37.8 54.8,37.8 68.36,24.24 MOTEUR2.2@69.9,24.24 69.06,24.24
PIC_PWM_2: PORT2.10 U201.77 | length 40.9
  Top Layer w0.254: U201.77@32,45.99 32,47.2 32.4,47.6 32.4,47.9 33.1,48.6 v1(33.1,49.6)
  MidLayer2 w0.254: PORT2.10@10.16,71.12 10.16,69.66 9.5,69 9.5,65.2 v1(13.2,61.5)
  Bottom Layer w0.254: v1(13.2,61.5) 16.8,61.5 23,55.3 24.1,55.3 24.3,55.1 28.6,55.1 29.1,54.6 29.1,54.2 33.1,50.2 v1(33.1,49.6)
PIC_PWM_3: PORT2.9 U201.78 | length 45.2
  Top Layer w0.254: U201.78@32.5,45.99 32.5,46.9 32.938,47.337 32.938,47.838 34.2,49.1 34.2,50 32.7,51.5 v1(32.8,51.5)
  MidLayer2 w0.254: PORT2.9@10.16,73.66 11.5,72.32 11.5,69.7 10.2,68.4 10.2,66.3 v1(14.3,62.2)
  Bottom Layer w0.254: v1(14.3,62.2) 18.8,62.2 22.2,58.8 22.2,57.2 23.5,55.9 28.7,55.9 29.7,54.9 29.7,54.6 v1(32.8,51.5)
PIC_RESET: "IN SITU.1" D204.3 P20.1 R201.1 R506.1 S201.1 U201.13 | length 57.3
  Top Layer w0.254: 13.4,45.04 R201.1@16.35,45.04 ; R506.1@16.45,42.54 16.45,44.94 R201.1@16.4,44.99 ; v1(22.7,43.4) 22.7,44.015 P20.1@21.8,44.915 D204.3@19.6,44.915 19.525,44.99 R201.1@16.4,44.99 ; U201.13@45.05,53.54 47.573,53.54 v1(47.97,53.143) ; v1(49,49.64) 51.4,49.64 53.25,51.49 S201.1@54.6,51.49 ; R201.1@16.35,45.04 R201.1@16.4,44.99 ; R201.1@16.35,45.04 R201.1@16.4,44.99
  MidLayer2 w0.254: v1(22.7,43.4) 29.185,43.4 v1(30.7,44.915)
  Bottom Layer w0.254: v1(30.7,44.915) 48.015,44.915 48.6,45.5 48.6,49.24 v1(49,49.64) 47.97,50.67 v1(47.97,53.143)
PIC_RS232_RX1: PORT2.11 U201.52 | length 25.2
  Top Layer w0.254: v1(16.6,66.7) 23.4,59.9 27.9,59.9 28.76,59.04 U201.52@29.95,59.04
  Bottom Layer w0.254: PORT2.11@12.7,73.66 12.84,73.66 14.1,72.4 14.1,69.2 v1(16.6,66.7)
PIC_RS232_TX1: PORT2.12 U201.53 | length 24.2
  Top Layer w0.254: v1(15.1,65.7) 21.4,59.4 27.4,59.4 28.26,58.54 U201.53@29.95,58.54
  Bottom Layer w0.254: PORT2.12@12.7,71.12 12.7,68.1 v1(15.1,65.7)
PIC_RS232_U2RX: PORT2.23 U201.49 | length 14.3
  Top Layer w0.254: PORT2.23@27.94,73.66 29.3,72.3 29.3,68.14 32,65.44 U201.49@32,61.09
PIC_RS232_U2TX: PORT2.24 U201.50 | length 11.5
  Top Layer w0.254: PORT2.24@27.94,71.12 27.94,68.8 31.5,65.24 U201.50@31.5,61.09
PIC_SD_GPIO1: R215.1 SD_CARD.9 U201.41 | length 101.2
  Top Layer w0.254: v1(35.9,64.8) 36.4,64.3 36.4,63.3 36,62.9 U201.41@36,61.09 ; v1(51,71.9) 51,66.4 63,54.4 v1(63,44.1) 64.6,42.5 R215.1@64.6,41.55
  MidLayer2 w0.254: v1(23,69.3) 27.5,64.8 v1(28.9,64.8)
  Bottom Layer w0.254: v1(23,69.3) 21.6,70.7 21.6,74.3 22.2,74.9 26.2,74.9 26.9,75.6 48.7,75.6 51,73.3 v1(51,71.9) ; v1(28.9,64.8) 30,65.9 34.8,65.9 v1(35.9,64.8) ; SD_CARD.9@55.6,44.5 57.7,44.5 58.1,44.1 v1(63,44.1)
PIC_SD_GPIO2: R216.1 SD_CARD.8 U201.42 | length 33.8
  Top Layer w0.254: U201.42@35.5,61.09 v1(35.5,63.7) ; v1(52.8,66.1) R216.1@52.8,67.75
  MidLayer2 w0.254: v1(35.5,63.7) 37.7,63.7 39.5,65.5 43.3,65.5 v1(44.3,64.5)
  Bottom Layer w0.254: v1(44.3,64.5) 44.3,65.8 46,67.5 48,67.5 51.9,63.6 55.58,63.6 SD_CARD.8@55.6,63.62 53.88,63.62 52.8,64.7 v1(52.8,66.1)
PIC_SPI_SCK: PORT2.37 SD_CARD.5 U201.10 U503.13 | length 91
  Top Layer w0.254: U503.13@2.37,57.79 2.37,60.27 3.3,61.2 v1(4.4,61.2) ; U201.10@45.05,52.04 46.5,52.04 47.2,51.34 50.4,51.34 52.575,53.515 52.575,57.9 ; PORT2.37@45.72,73.66 47,72.38 47,69.34 52.575,63.765 52.575,57.9 ; v1(53.6,57.9) 52.575,57.9
  Bottom Layer w0.254: v1(4.4,61.2) 6.3,63.1 18.9,63.1 24.3,68.5 24.3,71.8 24.9,72.4 25.9,72.4 26.7,73.2 26.7,74.5 27.1,74.9 44.48,74.9 PORT2.37@45.72,73.66 ; v1(53.6,57.9) 53.6,56.8 53.9,56.5 SD_CARD.5@55.6,56.5
PIC_SPI_SDI: PORT2.38 SD_CARD.7 U201.11 U503.15 | length 105.9
  Top Layer w0.254: U503.15@-0.17,57.79 -0.17,55.57 0.3,55.1 6.1,55.1 7,56 7,59.7 v1(6.7,60) ; U201.11@45.05,52.54 46.7,52.54 47.4,51.84 50.23,51.84 52.15,53.76 52.15,63.29 51.1,64.34 ; PORT2.38@45.72,71.12 45.72,69.72 51.1,64.34 ; v1(51.1,63.3) 51.1,64.34
  MidLayer2 w0.254: v1(6.7,60) 6.7,60.5 8.2,62 8.2,69.4 8.9,70.1 8.9,74.4 9.4,74.9 46.3,74.9 47,74.2 47,72.4 PORT2.38@45.72,71.12
  Bottom Layer w0.254: v1(51.1,63.3) 52.47,61.93 SD_CARD.7@55.6,61.93
PIC_SPI_SDO: PORT2.35 SD_CARD.2 U201.12 U503.14 | length 108.3
  Top Layer w0.254: U503.14@1.1,57.79 1.1,59.2 1.6,59.7 1.6,60.8 v1(1.8,60.9) ; v1(6.7,64) 10.8,64 16.5,69.7 16.5,71.6 17.3,72.4 18.7,72.4 19.1,72.8 19.1,74.2 19.8,74.9 41.94,74.9 PORT2.35@43.18,73.66 43.18,72.76 44.5,71.44 44.5,69.34 45.1,68.74 45.9,68.74 46.1,68.54 46.9,67.74 ; U201.12@45.05,53.04 47,53.04 47.7,52.34 50.14,52.34 51.7,53.9 51.7,62.2 51.4,62.5 50.8,62.5 50.3,63 50.3,64.34 46.9,67.74 ; v1(46.9,66.8) 46.9,67.74
  Bottom Layer w0.254: v1(1.8,60.9) 2.189,60.905 4.804,63.593 5.211,64 v1(6.7,64) ; v1(46.9,66.8) 47.5,66.8 50.3,64 50.3,59.4 52.7,57 52.7,50.2 53.4,49.5 SD_CARD.2@55.6,49.5
PIC_SPI_SS: U201.14
PIC_SPI_SS_CAN: U201.96 U503.16 | length 56.4
  Top Layer w0.254: U503.16@-1.44,57.79 -1.44,54.74 0.5,52.8 5.9,52.8 v1(6.3,53.2) ; U201.96@41.5,45.99 41.5,44.9 41.7,44.7 41.8,44.7 42.3,44.2 42.3,43.2 v1(42.6,42.9)
  MidLayer2 w0.254: v1(6.3,53.2) 7.8,53.2 v1(10.8,50.2)
  Bottom Layer w0.254: v1(10.8,50.2) 12,49 19.2,49 24.6,43.6 28.9,43.6 29.4,43.1 37.8,43.1 38.7,42.2 41.2,42.2 v1(42.6,42.9)
PIC_SPI_SS_I/O: PORT2.36 U201.97 | length 27.3
  Top Layer w0.254: U201.97@42,45.99 42,47.54 41.5,48.04 41.5,51.64 43.5,53.64 v1(43.5,53.94)
  Bottom Layer w0.254: PORT2.36@43.18,71.12 43.18,64.2 43.58,63.8 44,63.8 44.4,63.4 44.4,62.44 43.5,61.54 v1(43.5,53.94)
PIC_SPI_SS_SD: SD_CARD.1 U201.95 | length 19.5
  Top Layer w0.254: v1(40.6,43.2) 40.6,44.2 41,44.6 U201.95@41,45.99
  MidLayer2 w0.254: v1(46.6,43.54) 49.84,43.54 v1(53.1,46.8)
  Bottom Layer w0.254: v1(40.6,43.2) 41.4,43.2 41.74,43.54 v1(46.6,43.54) ; v1(53.1,46.8) 53.3,47 SD_CARD.1@55.6,47
PIC_USB_D+: U201.57 U504.3 | length 38.1
  Top Layer w0.254: v1(19.6,57.6) 20.8,57 21.26,56.54 U201.57@29.95,56.54
  MidLayer2 w0.254: v1(11.7,65.9) 12.6,65.9 19.6,58.9 v1(19.6,57.6)
  Bottom Layer w0.254: U504.3@-1.125,61.15 0,61.15 ; 0.55,61.15 0,61.15 ; v1(11.7,65.9) 8.2,65.9 7.1,64.8 5.1,64.8 1.9,61.6 1.4,61.6 0.95,61.15 0,61.15
PIC_USB_D-: U201.56 U504.1 | length 36.7
  Top Layer w0.254: v1(21.3,57.9) 22.16,57.04 U201.56@29.95,57.04
  MidLayer2 w0.254: v1(10.9,66.8) 12.4,66.8 v1(21.3,57.9)
  Bottom Layer w0.254: U504.1@-1.125,63.05 1.35,63.05 5.1,66.8 v1(10.9,66.8)
PIC_USB_USBID: U201.51
PIC_USB_VBUS: C209.1 C509.1 U201.54 U504.5 USB.1 | length 45.6
  Top Layer w0.254: USB.1@-9.7,62.14 v5@-5.34,62.14 ; C509.1@-5.35,63.6 -5.35,62.15 v5@-5.34,62.14 ; v5(-5.3,62.1) v5@-5.34,62.14 ; v5@-5.3,62.14 -3.56,62.14 -2.6,63.1 7.14,63.1 11.4,58.84 17.3,58.84 27.2,58.84 28,58.04 U201.54@29.95,58.04
  Bottom Layer w0.254: v5(-5.3,62.1) U504.5@-3.275,62.1
PIC_USB_VBUSON: U201.20
REG_FEEDBACK_1: C407.1 C408.2 R404.1 R405.2 U401.3 | length 12.3
  Top Layer w0.254: C407.1@-2.6,21.39 R404.1@-1.1,21.39 ; v3(-1,20.04) -1,21.29 R404.1@-1.1,21.39 ; U401.3@2.35,21.415 2.325,21.39 R405.2@0.4,21.39 R404.1@-1.1,21.39
  Bottom Layer w0.254: v3(-1,20.04) 1.3,20.04 2.85,21.59 C408.2@4.3,21.59
pads on no net: "IN SITU.6" D204.2 D401.2 PORT1.23 PORT1.24 PORT1.25 PORT1.26 PORT1.27 PORT1.28 PORT1.29 PORT1.30 S201.2 S201.4 S202.2 S202.4 S203.2 S203.4 S301.2 S301.4 SD_CARD.12 SD_CARD.13 SD_CARD.14 U101.3 U101.5 U101.7 U101.9 U201.1 U201.17 U201.38 U201.39 U201.40 U201.47 U201.48 U201.60 U201.61 U201.63 U201.64 U201.68 U201.69 U201.73 U201.79 U202.1 U202.2 U202.3 U301.15 U301.16 U301.18 U301.19 U301.20 U301.21 U301.24 U301.25 U301.27 U301.28 U301.29 U301.30 U301.31 U301.32 U301.33 U301.35 U301.51 U301.53 U301.54 U301.55 U301.58 U301.59 U301.60 U301.62 U301.63 U301.64 U301.67 U301.68 U301.69 U301.71 U301.72 U301.73 U301.74 U301.76 U301.77 U301.79 U301.80 U301.82 U301.83 U301.84 U301.85 U301.87 U301.88 U301.90 U301.91 U301.92 U301.93 U301.97 U301.120 U301.121 U301.123 U301.127 U301.131 U301.132 U301.134 U301.138 U301.139 U301.140 U301.141 U301.142 U301.143 U501.1 U502.5 U503.3 U503.10 U503.11 USB.5
copper on no net: | length 125.9
  Top Layer w0.254: -10,69.8 -10,72.5 ; -7.7,69.8 -7.7,72.5 ; -5.4,69.8 -5.4,72.5 ; -12.2,69.8 -3.2,69.8 -3.2,72.5 -12.2,72.5 -12.2,69.8
  GND_Layer w0.254: -10,69.8 -10,72.5 ; -7.7,69.8 -7.7,72.5 ; -5.4,69.8 -5.4,72.5 ; -12.2,69.8 -3.2,69.8 -3.2,72.5 -12.2,72.5 -12.2,69.8
  MidLayer2 w0.254: -10,69.8 -10,72.5 ; -7.7,69.9 -7.7,72.5 ; -5.4,69.8 -5.4,72.5 ; -12.2,69.8 -3.2,69.8 -3.2,72.5 -12.2,72.5 -12.2,69.8
  Bottom Layer w0.254: -10,69.8 -10,72.5 ; -7.7,69.8 -7.7,72.5 ; -5.4,69.8 -5.4,72.5 ; -12.2,69.8 -3.2,69.8 -3.2,72.5 -12.2,72.5 -12.2,69.8

## Polygon pours and split planes (outlines as drawn)
GND on Top Layer "Bottom Layer-No Net 1" (solid, remove dead copper, pour order 1000): 81.7,75 81.7,-1.7 -19.8,-1.7 -20,-1.7 -20,75
+5V on Top Layer "Bottom Layer-No Net 1" (solid, remove dead copper, pour order 1000): -10.7,13.831 -13.8,16.931 -13.8,24.8 -13.8,33.4 -13.2,34 -8.8,34 -8.5,34 -8,33.5 -8,32.3 -8.9,31.4 -10.5,31.4 -10.8,31.4 -11.6,30.6 -11.7,30.5 -11.7,28.2 -11.7,23.1 -11.7,19.7 -10.84,18.84 -9.1,18.84 -8.558,18.298 -8.558,18.286 -8.5,18.228 -8.5,15.937 -8.5,14
+3V3 on Top Layer "Bottom Layer-No Net 1" (solid, remove dead copper, pour order 1016): 7.7,29.24 7.9,29.24 9.6,27.54 9.7,27.44 9.7,25.84 9.7,25.54 9.5,25.34 9.1,25.34 8.1,26.34 7.5,26.34 1.5,26.34 1.2,26.64 1.2,29.24
GND on Top Layer "Bottom Layer-No Net 1" (solid, remove dead copper, pour order 1015): -10.118,13.44 -9.2,13.44 -8.9,13.14 -8.9,8.186 -7.227,6.513 -7.227,5.667 -7.2,5.64 -10.4,5.64 -10.4,13.158 -10.118,13.44
GND on Top Layer "Bottom Layer-No Net 1" (solid, remove dead copper, pour order 1014): -10.7,13.44 -11.2,12.94 -11.2,7.94 -11.2,2.94 -8.495,0.235 -8.5,0.24 -8.5,5.24 -7.2,6.54 -7.8,6.54 -9,7.74 -9,12.94 -9.5,13.44 -10.7,13.44
GND on Top Layer "Bottom Layer-No Net 1" (solid, remove dead copper, pour order 1013): -5.9,27.74 -6.6,27.04 -6.6,24.74 -6.6,22.94 -6.6,22.74 -6.9,22.44 -7.6,22.44 -8.5,21.54 -8.5,19.54 -8.8,19.24 -10.6,19.24 -11.2,19.84 -11.2,20.54 -11.2,24.34 -11.2,24.84 -10.9,25.14 -9.8,25.14 -8.1,26.84 -8,26.94 -8,29.84 -5.9,27.74
+3V3 on Top Layer "Bottom Layer-No Net 1" (solid, remove dead copper, pour order 1012): 1.5,26.34 7.5,26.34 8,26.84 8,28.44 8,28.84 8,28.94 7.7,29.24 1.2,29.24 1,29.04 1,28.14 0.2,27.34 -2.3,27.34 -5.3,27.34 -5.8,27.34 -6.2,26.94 -6.2,23.24 -6.2,22.94 -5.8,22.54 -5.7,22.44 -4.3,22.44 -4.1,22.24 -0.6,22.24 -0.5,22.34 -0.5,24.24 1.5,26.24 1.5,26.34
GND on Top Layer "Bottom Layer-No Net 1" (solid, remove dead copper, pour order 1011): -7.4,29.24 -5.9,27.74 -5,27.74 -5,32.24 -7.3,32.24 -8,31.54 -8,29.84
GND on Top Layer "Bottom Layer-No Net 1" (solid, remove dead copper, pour order 1010): -5.9,29.24 -5.4,28.74 -5.4,28.14 -5,27.74 -0.3,27.74 -0.1,27.74 0.4,28.24 0.6,28.44 0.6,29.04 0.6,29.14 1.1,29.64 1.9,29.64 8.2,29.64 10.4,27.44 12.6,27.44 12.635,27.475 12.635,29.805 10.2,32.24 -5.9,32.24 -5.9,29.24
GND on Top Layer "Bottom Layer-No Net 1" (solid, remove dead copper, pour order 1009): 11.875,9.815 12.4,10.34 12.8,10.74 12.8,14.24 12.8,21.64 12.8,29.64 12.4,30.04 10.8,30.04 10.5,29.74 10.5,15.64 10.4,15.54 10.4,11.74 10.4,10.24 10.9,9.74 10.975,9.815 11.875,9.815
GND on Top Layer "Bottom Layer-No Net 1" (solid, remove dead copper, pour order 1008): 6.5,5.84 7.9,5.84 9.6,7.54 12.4,10.34 8,10.34 8,7.84 7,6.84 7,6.34 6.5,5.84
GND on Top Layer "Bottom Layer-No Net 1" (solid, remove dead copper, pour order 1007): -7.3,32.24 10.2,32.24 12.4,30.04 12.4,28.94 12.4,10.34 9.7,7.64 9.6,7.54 8.2,7.54 6.5,5.84 4.5,5.84 4.5,5.867 5.4,6.767 5.473,6.84 7,6.84 8,7.84 8,9.54 8,13.74 8.1,13.84 8.3,14.04 10.2,14.04 10.7,14.54 10.7,15.24 10.4,15.54 10.4,22.04 10.4,27.94 10.4,28.14 8.2,30.34 4.3,30.34 -4,30.34 -4.8,30.34 -5.9,29.24 -7.4,29.24 -8,29.84 -8,30.94 -8,31.54 -7.3,32.24
NetD403_2 on Top Layer "Bottom Layer-No Net 1" (solid, remove dead copper, pour order 1006): 9.3,23.04 9.3,19.44 8.9,19.04 6.3,19.04 5.8,19.54 5.8,20.14 5.2,20.74 4.925,20.74 4.25,21.415 4.25,23.04 9.3,23.04
NetD403_2 on Top Layer "Bottom Layer-No Net 1" (solid, remove dead copper, pour order 1005): 4.203,22.842 1.529,22.842 1.125,23.245 1.125,25.563 1.428,25.865 8.089,25.865 9.3,24.656 9.3,23.044 8.795,22.54 7.382,22.54 7.08,22.842 4.203,22.842
GND on Top Layer "Bottom Layer-No Net 1" (solid, remove dead copper, pour order 1004): 3.1,8.74 3.1,10.54 2.3,11.34 2.3,12.74 2.3,12.84 2.3,13.14 2.5,13.34 2.6,13.34 4.4,13.34 4.6,13.14 4.6,13.04 4.6,11.34 4.2,10.94 4.2,9.04 4.5,8.74 3.1,8.74
NetC401_2 on Top Layer "Bottom Layer-No Net 1" (solid, remove dead copper, pour order 1003): 4.6,10.74 4.6,9.34 4.9,9.04 6.2,9.04 7,9.84 7,13.94 7,14.04 5.5,15.54 5.2,15.54 4.9,15.24 4.9,11.04 4.6,10.74
NetC401_2 on Top Layer "Bottom Layer-No Net 1" (solid, remove dead copper, pour order 1002): -8,18.24 -8,16.24 -7.8,16.04 -1.8,16.04 -0.5,14.74 -0.5,13.94 -0.2,13.64 4.9,13.64 5.1,13.64 5.5,14.04 5.5,19.44 5.5,19.74 4.9,20.34 4,20.34 3.8,20.34 3.3,19.84 3.3,18.44 3.3,18.04 2.8,17.54 2,17.54 1.3,18.24 -0.5,18.24 -0.7,18.24 -1.8,19.34 -3.5,19.34 -4.2,20.04 -4.5,20.34 -4.5,21.34 -5.1,21.94 -6.7,21.94 -7.4,21.94 -8,21.34 -8,18.24
GND on Top Layer "Bottom Layer-No Net 1" (solid, remove dead copper, pour order 1001): -7.2,5.04 -8.5,3.74 -8.5,0.24 -7.5,-0.76 -1.7,-0.76 -1.2,-1.26 0.9,-1.26 1.5,-0.66 1.5,4.54 2.8,5.84 4.5,5.84 5.4,6.74 5.4,8.34 5,8.74 3.1,8.74 2.9,8.54 1.3,8.54 1.2,8.54 0.3,7.64 -1.9,7.64 -3,6.54 -7.2,6.54 -8.5,5.24 -8.5,3.74 -7.2,5.04
+5V on Top Layer "Bottom Layer-No Net 1" (solid, remove dead copper, pour order 1000): -8.5,13.34 -8.98,13.831 -9,13.831 -10.7,13.831 -11.2,14.342 -11.2,16.284 -11.2,18.227 -10.6,18.84 -10.1,18.84 -9.5,18.84 -9.1,18.84 -8.5,18.227 -8.5,15.937 -8.04,15.466 -8.04,13.81 -8.5,13.34
+5V on Top Layer "Bottom Layer-No Net 1" (solid, remove dead copper, pour order 1000): -3.2,7.04 -7.2,7.04 -8.5,8.34 -8.5,10.14 -8.5,13.46 -10,14.96 -10,17.5 -8.04,15.54 -1.8,15.54 -1,14.74 -1,14.34 -1,11.34 -0.4,10.74 0.2,10.74 0.3,10.74 0.8,10.24 0.8,8.54 0.3,8.04 -0.4,8.04 -0.7,8.04 -2.2,8.04 -3.2,7.04
GND on GND_Layer "Bottom Layer-No Net 1" (solid, remove dead copper, pour order 1001): -20,75 81.7,75 81.7,-1.7 -20,-1.7 -20,75
GND on MidLayer2 "Bottom Layer-No Net 1" (solid, remove dead copper, pour order 1002): -20,75 81.7,75 81.7,64.5 81.7,57 81.7,27.2 81.7,-1.7 -20,-1.7 -20,75
+5V on MidLayer2 "Bottom Layer-No Net 1" (solid, remove dead copper, pour order 1001): -10.7,13.8 -9,13.8 -8.7,13.8 -7.4,15.1 -7.4,17.8 -7.4,17.9 -8.4,18.9 -8.5,19 -11.1,19 -11.1,18.9 -12.1,17.9 -12.1,14.7 -11.2,13.8 -10.7,13.8
+1V2 on MidLayer2 "Bottom Layer-No Net 1" (solid, remove dead copper, pour order 1000): -13.8,28.501 -13.2,29.1 -11.9,29.1 -11.3,28.501 -11.3,26.706 -11.1,26.506 -3.6,26.506 -1.4,26.506 -1.2,26.506 -0.1,25.409 -0.1,24.91 5.8,19.024 13.6,19.024 15.2,17.428 17.9,17.428 22.4,17.428 23.8,16.032 30.5,16.032 34.2,19.723 36.5,19.723 36.9,19.324 36.9,13.737 35.8,12.64 30.3,12.64 18.8,12.64 14,12.64 12.2,14.436 -1.8,14.436 -8.9,21.518 -11.5,21.518 -13.8,23.813 -13.8,28.501
+1V2 on MidLayer2 "Bottom Layer-No Net 1" (solid, remove dead copper, pour order 1001): 36.9,21.1 35.1,22.9 35.1,28 37.3,30.2 37.3,31.1 37.3,31.8 39.2,33.7 46,33.7 48.6,31.1 48.6,26.4 48.6,26.14 46.1,23.64 45.56,23.64 44.7,24.5 44.5,24.7 44.5,26.7 42.9,28.3 41.9,28.3 40.634,27.033 37.793,27.033 36.9,26.14 36.9,21.3
+3V3 on MidLayer2 "Bottom Layer-No Net 1" (solid, remove dead copper, pour order 1002): 6.6,30.7 6.6,25.3 9.7,22.2 11.8,22.2 11.9,22.2 13.9,20.2 13.9,19.3 15.4,17.8 26.9,17.8 31.7,17.8 32.6,18.7 32.6,19.8 31.3,21.1 31.3,22.8 31.3,24.1 31.3,24.2 24.2,31.3 23.2,32.3 23.2,35.7 11.6,35.7 6.6,30.7
+3V3 on MidLayer2 "Bottom Layer-No Net 1" (solid, remove dead copper, pour order 1003): 6.6,30.7 6.6,42.8 11.38,47.58 13.4,47.58 13.4,48.1 17.1,51.8 28.6,51.8 30.9,49.5 30.9,41.6 33.9,38.6 34.5,38 34.5,35.1 31.7,32.3 27.5,32.3 24.1,35.7 23.2,35.7 16,28.5 6.6,28.5
+3V3 on MidLayer2 "Bottom Layer-No Net 1" (solid, remove dead copper, pour order 1004): 43.7,22 44.9,22 48.9,26 49,26.1 49,31.7 43.4,37.3 43.4,46 47.4,50 47.4,54 49,55.6 53.9,55.6 54.6,54.9 54.6,51.9 54.6,51.4 54.3,51.1 49.9,51.1 49.5,50.7 49.5,43.7 53.2,40 53.2,20.3 49.4,16.5 45.3,16.5 43.4,18.4 43.4,21.7 43.7,22
+3V3 on MidLayer2 "Bottom Layer-No Net 1" (solid, remove dead copper, pour order 1005): 16.988,51.688 46.112,51.688 49.6,48.2 50,47.8 50,26.1 49.2,26.9 13.3,26.9 13.3,48 16.885,51.585
+5V on MidLayer2 "Bottom Layer-No Net 1" (solid, remove dead copper, pour order 1006): -13.9,33.4 -13.9,32 -13.1,31.2 -10,31.2 -9.7,31.2 -9.6,31.2 -9,31.8 -9,45.8 -8,45.8 -6.2,47.6 -1.2,52.6 0.9,54.7 0.9,74.9 -1.3,74.9 -2.6,73.6 -2.6,70.9 -2.6,57 -2.6,55.6 -4.4,53.8 -10.7,53.8 -13.1,51.4 -13.9,50.6 -13.9,33.4
+5V on MidLayer2 "Bottom Layer-No Net 1" (solid, remove dead copper, pour order 1007): -8.7,13.8 -0.7,5.8 11.7,5.8 13.5,4 46,4 47.1,2.9 47.1,-0.8 47.6,-1.3 64.8,-1.3 70.8,4.7 78.2,12.1 78.2,15.9 76.3,17.8 75.7,17.8 65.2,17.8 62.7,15.3 48.1,15.3 44.2,11.4 28,11.4 -0.1,11.4 -4.2,15.5 -8.36,15.5 -8.9,14.96 -8.9,14 -8.7,13.8
GND on Bottom Layer "Bottom Layer-No Net 1" (solid, remove dead copper, pour order 1003): -20,75 81.7,75 81.7,-1.7 -20,-1.7
+3V3 on Bottom Layer "Bottom Layer-No Net 1" (solid, remove dead copper, pour order 1003): 30.7,20.2 34.7,20.2 35.2,20.2 37.3,18.1 37.3,12.6 36.9,12.2 36.8,12.3 29.6,12.3 29.6,12.8 29.2,13.2 29.2,16.7 30.7,18.2 30.7,20.2
+3V3 on Bottom Layer "Bottom Layer-No Net 1" (solid, remove dead copper, pour order 1002): 29.2,16.7 31.7,16.7 34.5,16.7 36.6,14.6 36.6,14.2 38,12.8 43.8,12.8 44.2,12.4 44.4,12.2 44.4,10.4 45,9.8 45.8,9.8 48.7,9.8 49.6,8.9 49.6,6.8 48.8,6 48.6,5.8 41.6,5.8 22.3,5.8 21.2,6.9 21.2,8.1 21.21,8.1 22.2,9.09 22.41,9.3 24,9.3 25.3,9.3 28.2,12.2 29.2,13.2 29.2,16.7
GND on Bottom Layer "Bottom Layer-No Net 1" (solid, remove dead copper, pour order 1026): 11.3,24.24 10.8,23.74 10.7,23.64 9.3,23.64 9.25,23.64 8.9,23.29 10.4,21.79 10.4,20.913 11.3,21.813 11.3,24.24
GND on Bottom Layer "Bottom Layer-No Net 1" (solid, remove dead copper, pour order 1025): 7.9,5.84 12.8,10.74 12.8,29.64 10.2,32.24 -0.873,32.24 -0.9,32.213 -0.9,30.94 -1.9,29.94 0.7,29.94 1.5,30.74 7.6,30.74 10.7,27.64 11.3,27.04 11.3,25.64 11.3,24.24 10.4,23.34 10.4,14.24 10.2,14.04 9.2,13.04 8,13.04 7.9,12.94 7.9,5.84
GND on Bottom Layer "Bottom Layer-No Net 1" (solid, remove dead copper, pour order 1024): 3.2,17.74 3.2,14.04 4.2,13.04 8.2,13.04 9,13.04 9.4,12.64 9.4,7.34 8.2,6.14 7.9,5.84 2.7,5.84 -6.3,5.84 -10.1,5.84 -11.2,6.94 -11.2,12.94 -10.5,13.64 -9.1,13.64 -8.6,14.14 -8.5,14.24 -8.5,17.24 -8.5,17.54 -8,18.04 -7.7,18.34 -6.5,18.34 2.6,18.34 3.2,17.74
+1V2 on Bottom Layer "Bottom Layer-No Net 1" (solid, remove dead copper, pour order 1023): -5.8,28.44 -6.1,28.14 -7.5,28.14 -7.8,28.14 -8,27.94 -8,26.94 -7.7,26.64 -6.5,25.44 -5.3,25.44 -5.8,25.94 -5.8,28.44
+1V2 on Bottom Layer "Bottom Layer-No Net 1" (solid, remove dead copper, pour order 1022): -5.8,25.94 -5.8,28.44 -4.6,29.64 -2,29.64 -1,28.64 -1,27.94 -1,25.94 -1.5,25.44 -5.3,25.44 -5.8,25.94
+1V2 on Bottom Layer "Bottom Layer-No Net 1" (solid, remove dead copper, pour order 1021): -1.3,23.84 -1.3,22.84 -0.3,22.84 -0.3,25.24 -1,25.94 -1,27.94 -2.3,29.24 -4.7,29.24 -5.8,28.14 -5.8,26.24 -5.8,25.94 -5.3,25.44 -1.7,25.44 -1.3,25.04 -1.3,23.84
GND on Bottom Layer "Bottom Layer-No Net 1" (solid, remove dead copper, pour order 1020): -7.5,28.44 -7.7,28.44 -8,28.74 -8,33.44 -8.5,33.94 -10.9,33.94 -11.3,34.34 -11.3,35.94 -10.9,36.34 -6.7,36.34 -3.3,36.34 -0.9,33.94 -0.9,31.14 -0.9,30.94 -1.9,29.94 -4.7,29.94 -6.2,28.44
+3V3 on Bottom Layer "Bottom Layer-No Net 1" (solid, remove dead copper, pour order 1019): 7.1,25.04 1.43,25.04 1.4,25.07 1.375,25.095 1.375,26.767 1.848,27.24 6.3,27.24 6.3,25.84 7.1,25.04
+3V3 on Bottom Layer "Bottom Layer-No Net 1" (solid, remove dead copper, pour order 1018): -0.4,27.44 -0.4,26.04 0.4,25.24 0.4,24.94 0.4,22.74 1.4,22.74 1.4,25.14 1.4,25.54 2.2,26.34 5.8,26.34 7.1,25.04 9.7,25.04 9.9,25.04 10.2,25.34 10.2,27.64 8.2,29.64 1.8,29.64 -0.4,27.44
NetD403_2 on Bottom Layer "Bottom Layer-No Net 1" (solid, remove dead copper, pour order 1017): 5.8,22.64 9,22.64 9.3,22.34 9.3,22.04 9.3,17.54 9.3,15.04 8,13.74 4.2,13.74 3.7,14.24 3.7,17.74 5,19.04 5.3,19.34 5.3,22.14 5.8,22.64
GND on Bottom Layer "Bottom Layer-No Net 1" (solid, remove dead copper, pour order 1000): -11.3,19.84 -11.3,19.14 -10.9,18.74 -10.8,18.64 -8.9,18.64 -8.5,18.24 -8.5,17.54 -8.5,16.815 -2.373,16.815 -2.373,17.913 -2.8,18.34 -7.4,22.94 -10.7,22.94 -11.2,22.44 -11.2,22.24 -11.3,22.14 -11.3,19.84
+1V2 on Bottom Layer "Bottom Layer-No Net 1" (solid, remove dead copper, pour order 1000): -8,26.94 -8.5,26.44 -11,26.44 -11.3,26.74 -11.3,26.84 -11.3,28.54 -11.9,29.14 -12.5,29.14 -13.2,29.14 -13.8,28.54 -13.8,24.54 -13.8,23.84 -13.2,23.24 -11.8,23.24 -11.4,23.64 -11.4,25.14 -11,25.54 -6.6,25.54
+1V2 on Bottom Layer "Bottom Layer-No Net 1" (solid, pour order 1001): -5.2,25.44 -7.9,25.44 -8.6,24.74 -9.5,24.74 -10.7,24.74 -11,24.44 -11,23.84 -11.6,23.24 -11.9,23.24 -11.9,26.14 -11.6,26.44 -11.5,26.54 -8,26.54 -5.6,26.54 -5.2,26.14 -5.2,25.44

## Other copper
Top Layer:
  rectangle net +5V: 36,4.4 44.8,5.4
  text "1" at -11.2,70.4 h1.52
GND_Layer:
  text "2" at -9.4,70.4 h1.52
MidLayer2:
  text "3" at -7.1,70.4 h1.52
Bottom Layer:
  rectangle net GND: -8.05,9.515 3.05,16.815
  text "4" at -5,70.4 h1.52

## Text inside footprints (layer, text, board x,y; h text height)
PORT1: Bottom Overlay "39" at 25.4,3.048 h1 r180; Bottom Overlay "1" at -1.6,3.048 h1 r180
PORT2: Bottom Overlay "39" at 25.4,74.168 h1 r180; Bottom Overlay "1" at -1.6,74.168 h1 r180